# Altium PCB nrf52840_ckaa_var6.PcbDoc
Units mm, origin at the board's own origin, x right, y up, seen from the top; angles counter-clockwise.
Board outline 12.7 x 12.5 mm, 4 copper layers (Top Layer, Mid Layer 1, Mid Layer 2, Bottom Layer), stack 1.583 mm thick; 18 components, 60 nets, 169 pads, 104 vias.
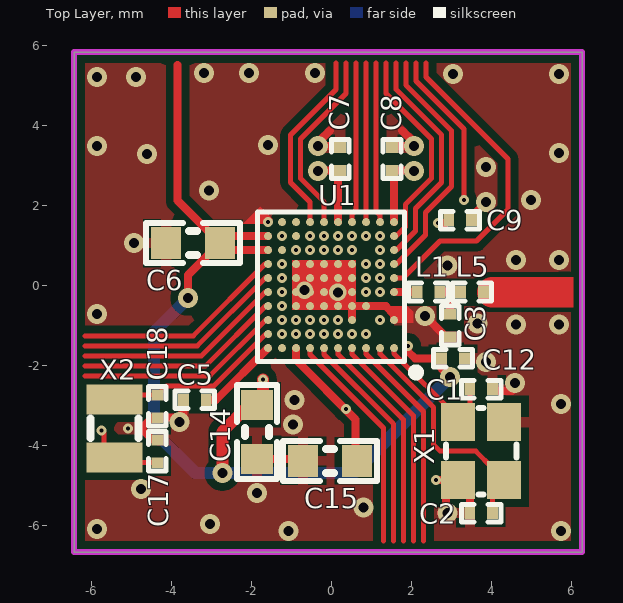
[diagram p0: Top Layer view]
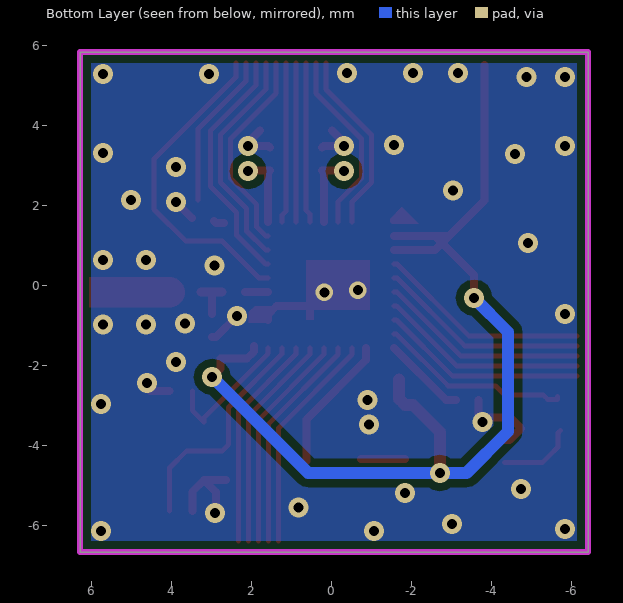
[diagram p1: Bottom Layer view, seen from below]
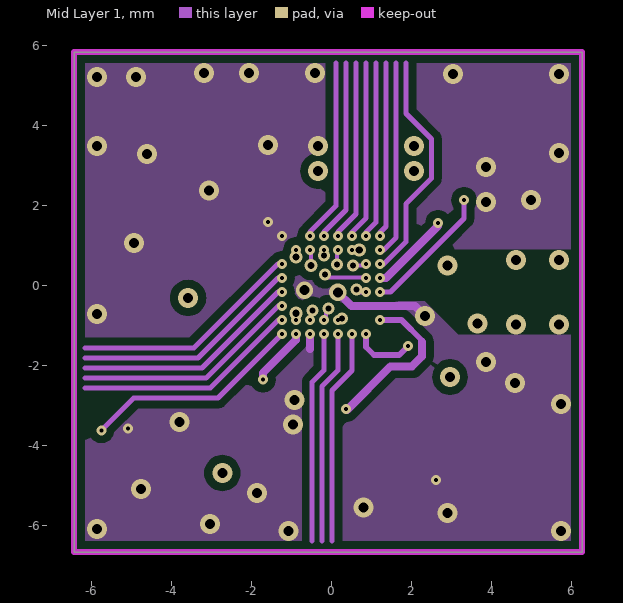
[diagram p2: Mid Layer 1]
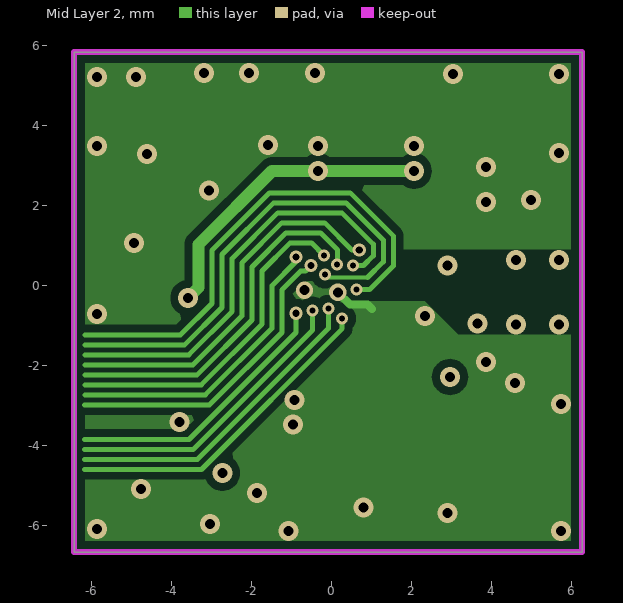
[diagram p3: Mid Layer 2]
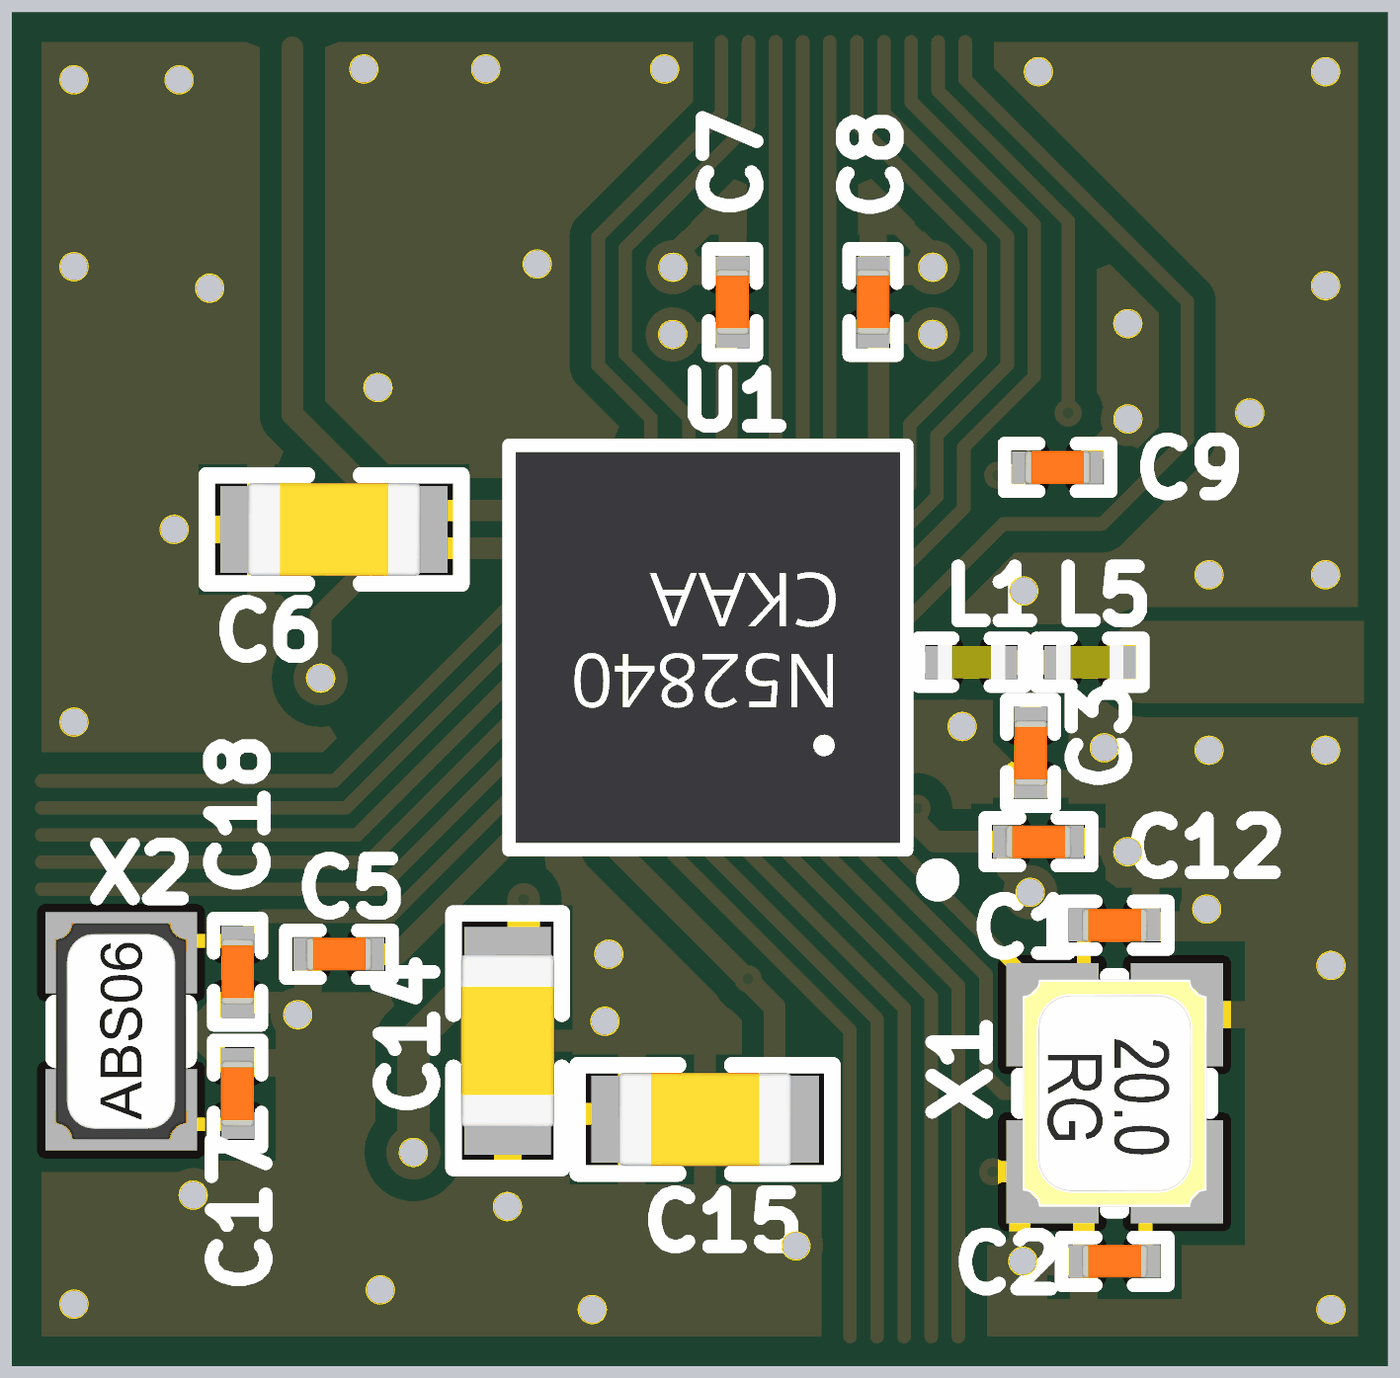
[diagram p4: 3D render of the assembled board from above, using the file's embedded part models]

## Layer stack, top to bottom
Top Solder: solder mask 0.0102, Solder Resist, Dk 3.5
Top Layer: signal copper 0.0356
Dielectric1: core 0.07, FR-4, Dk 4.8
Mid Layer 1: signal copper 0.036
Dielectric 3: prepreg 1.3, Dk 4.2
Mid Layer 2: signal copper 0.036
Dielectric 2: core 0.07, Dk 4.2
Bottom Layer: signal copper 0.0356
Bottom Solder: solder mask 0.0102, Solder Resist, Dk 3.5

## Board outline
-6.425,-6.675 6.275,-6.675 6.275,5.825 -6.425,5.825

## Design rules (kind name [scope] priority, off if disabled: settings)
Clearance Polygon_ANT [(InNamedPolygon('Top_Layer-GND')) or  (InNamedPolygon('Mid_Layer_1-GND')) or (InNamedPolygon('Mid_Layer_2-GND')) or (InNamedPolygon('Bottom_Layer-GND')) vs InNet('RF')] p1: gap=0.125 ignorepadtopadclearanceinfootprint=FALSE
Clearance Polygon [(InNamedPolygon('Top_Layer-GND')) or  (InNamedPolygon('Mid_Layer_1-GND')) or (InNamedPolygon('Mid_Layer_2-GND')) or (InNamedPolygon('Bottom_Layer-GND'))] p2: gap=0.2 ignorepadtopadclearanceinfootprint=FALSE
Clearance Clearance_Multi [OnLayer('Multi-Layer') vs OnLayer('Multi-Layer')] p3: gap=0.1 ignorepadtopadclearanceinfootprint=FALSE
Clearance Clearance_Top [OnLayer('Top Layer')] p4: gap=0.125 ignorepadtopadclearanceinfootprint=FALSE
Clearance [All] p5: gap=0.1 ignorepadtopadclearanceinfootprint=FALSE
ComponentClearance [All] p1 off: gap=0.254 collisioncheckmode=3 verticalgap=0.254 showdistances=FALSE
FabricationTestPointUsage TestPointUsage [All] p1: valid=0 allowmultiple=FALSE
FabricationTestpoint Testpoint [All] p1: side=3 testpointundercomponent=TRUE minsize=1.016 maxsize=2.54 preferedsize=1.524 minholesize=0 maxholesize=1.016 preferedholesize=0.813 testpointgrid=0.025 allowsidetop=TRUE allowsidebottom=TRUE usegrid=TRUE gridtolerance=0
Height [All] p1 off: minheight=0 maxheight=25.4 prefheight=12.7
HoleSize [All] p1: absolutevalues=TRUE maxlimit=4.064 minlimit=0.1 maxpercent=80.000 minpercent=20.000
MinimumAnnularRing [All] p1 off: minimumring=0.152
PlaneConnect [All] p1: planeconnectstyle=Relief reliefexpansion=0.508 reliefentries=4 reliefconductorwidth=0.254 reliefairgap=0.15
PolygonConnect PolygonConnect_1 [isVia and innet(gnd)] p1: connectstyle=Direct reliefconductorwidth=0.254 reliefentries=4 polygonreliefangle="90 Angle" airgapwidth=0.254
PolygonConnect [All] p2: connectstyle=Relief reliefconductorwidth=0.254 reliefentries=4 polygonreliefangle="90 Angle" airgapwidth=0.2
RoutingVias [All] p1: holewidth=0.2 width=0.35 viastyle="Through Hole" minholewidth=0.1 minwidth=0.25 maxholewidth=0.25 maxwidth=0.5
SilkToSolderMaskClearance SilkscreenOverComponentPads [IsPad] p1: minsilkscreentomaskgap=0.254 clearancetoexposedcopper=TRUE
SolderMaskExpansion [All] p1: expansion=0.076
Width [All] p1: maxlimit=2 minlimit=0.095 preferedwidth=0.15 midlayer1_minwidth=0.1 midlayer2_minwidth=0.1 bottomlayer_minwidth=0.1 minimp=50.000000 maximp=50.000000 favimp=50.000000
23 further rules are at their usual default settings.

## Components (designator, comment, footprint, x,y, rotation, side; value= is the part's Value field where it differs from the comment)
C1 "12pF" CAPC0603X03L_C 3.754,-2.603 r0 top
C2 "12pF" CAPC0603X03L_C 3.754,-5.705 r180 top
C3 "1.0pF" CAPC0603X03L_C 2.979,-1.013 r90 top
C5 "100nF" CAPC0603X03L_C -3.405,-2.87 r180 top
C6 "4.7µF" CAPC1608X06L -3.45,1.05 r180 top
C7 "100nF" CAPC0603X03L_C 0.228,3.15 r90 top
C8 "100nF" CAPC0603X03L_C 1.525,3.15 r90 top
C9 "820pF" CAPC0603X03L_C 3.227,1.622 r0 top
C12 "100nF" CAPC0603X03L_C 3.05,-1.832 r0 top
C14 "1.0µF" CAPC1608X06L -1.847,-3.67 r270 top
C15 "1.0µF" CAPC1608X06L -0.025,-4.394 r0 top
C17 "12pF" CAPC0603X03L_C -4.34,-4.157 r90 top
C18 "12pF" CAPC0603X03L_C -4.34,-3.032 r270 top
L1 "3.9nH" INDC0603X03L_C 2.432,-0.175 r0 top
L5 "4.7nH" INDC0603X03L_C 3.525,-0.175 r0 top
U1 "nRF52840_CKAA" BGA94C35P10X10_352X356X50 0,0 r180 top locked
X1 "32MHz" BT-XTAL_2016 3.754,-4.154 r270 top
X2 "32.768kHz" XTAL_2012 -5.415,-3.582 r90 top

## Footprints (in the part's own frame and the unit in brackets; to place one, negate y for a bottom-side part, rotate by r counter-clockwise, add the part's x,y. Pads: shape width x height; smd on the part's side, far side on the other; paste and mask are expansions set on the pad)
BGA94C35P10X10_352X356X50 [mm] "BGA, 94-Leads, Body 3.52x3.56mmx0.50mm, Pitch 0.35mm"
  round 0.2 smd mask+0.04: A1(-1.575,1.575) A2(-1.225,1.575) A3(-0.875,1.575) A4(-0.525,1.575) A5(-0.175,1.575) A6(0.175,1.575) A7(0.525,1.575) A8(0.875,1.575) A9(1.225,1.575) A10(1.575,1.575) B3(-0.875,1.225) B4(-0.525,1.225) B5(-0.175,1.225) B6(0.175,1.225) B7(0.525,1.225) B8(0.875,1.225) B9(1.225,1.225) B10(1.575,1.225) C1(-1.575,0.875) C2(-1.225,0.875) C4(-0.525,0.875) C5(-0.175,0.875) C6(0.175,0.875) C7(0.525,0.875) C8(0.875,0.875) C9(1.225,0.875) C10(1.575,0.875) D3(-0.875,0.525) D4(-0.525,0.525) D5(-0.175,0.525) D6(0.175,0.525) D7(0.525,0.525) D8(0.875,0.525) D9(1.225,0.525) D10(1.575,0.525) E1(-1.575,0.175) E2(-1.225,0.175) E3(-0.875,0.175) E4(-0.525,0.175) E5(-0.175,0.175) E6(0.175,0.175) E7(0.525,0.175) E8(0.875,0.175) E9(1.225,0.175) E10(1.575,0.175) F1(-1.575,-0.175) F2(-1.225,-0.175) F3(-0.875,-0.175) F4(-0.525,-0.175) F5(-0.175,-0.175) F6(0.175,-0.175) F7(0.525,-0.175) F8(0.875,-0.175) F9(1.225,-0.175) F10(1.575,-0.175) G1(-1.575,-0.525) G2(-1.225,-0.525) G3(-0.875,-0.525) G4(-0.525,-0.525) G5(-0.175,-0.525) G6(0.175,-0.525) G7(0.525,-0.525) G8(0.875,-0.525) G9(1.225,-0.525) G10(1.575,-0.525) H1(-1.575,-0.875) H2(-1.225,-0.875) H4(-0.525,-0.875) H5(-0.175,-0.875) H6(0.175,-0.875) H7(0.525,-0.875) H8(0.875,-0.875) H9(1.225,-0.875) H10(1.575,-0.875) J1(-1.575,-1.225) J2(-1.225,-1.225) J3(-0.875,-1.225) J4(-0.525,-1.225) J5(-0.175,-1.225) J6(0.175,-1.225) J7(0.525,-1.225) J8(0.875,-1.225) J9(1.225,-1.225) J10(1.575,-1.225) K1(-1.575,-1.575) K2(-1.225,-1.575) K3(-0.875,-1.575) K4(-0.525,-1.575) K5(-0.175,-1.575) K6(0.175,-1.575) K7(0.525,-1.575) K8(0.875,-1.575) K9(1.225,-1.575) K10(1.575,-1.575)
  silkscreen extent -2.22,-1.83 1.83,2.28, body extent -1.77,-1.76 1.77,1.84, height 0.47
BT-XTAL_2016 [mm] "Crystal 2.0 x 1.6 mm"
  rect 0.95x0.85 smd: 1(-0.725,-0.575) 2(0.725,-0.575) 3(0.725,0.575) 4(-0.725,0.575)
  silkscreen extent -1.08,-0.88 1.08,0.88, body extent -1.05,-0.85 1.05,0.85, height 0.56
CAPC0603X03L_C [mm] "Chip Capacitor, 2-Leads, Body 0.6x0.3mm, IPC High Density"
  rect 0.27x0.3 smd: 1(-0.285,0) 2(0.285,0)
  silkscreen extent -0.49,-0.22 0.49,0.22, body extent -0.3,-0.15 0.31,0.15, height 0.3
CAPC1608X06L [mm] "Chip Capacitor, 2-Leads, Body 1.6x0.8mm, IPC High Density"
  rect 0.75x0.8 smd: 1(-0.675,0) 2(0.675,0)
  silkscreen extent -1.17,-0.5 1.17,0.5, body extent -0.8,-0.43 0.8,0.43, height 0.8
INDC0603X03L_C [mm] "Chip Inductor, 2-Leads, Body 0.6x0.3mm, IPC High Density"
  rect 0.27x0.3 smd: 1(-0.285,0) 2(0.285,0)
  silkscreen extent -0.49,-0.22 0.49,0.22, body extent -0.31,-0.16 0.31,0.16, height 0.26
XTAL_2012 [mm] "XTAL SMD 2.0 x 1.2 mm"
  rect 0.75x1.4 smd: 1(-0.725,0) 2(0.725,0)
  silkscreen extent -0.24,-0.6 0.24,0.6, body extent -1,-0.61 1,0.61, height 0.6

## Part data
C1 C2 C17 C18: library part C0201-12p, "Capacitor, NP0, ±2%", Footprint Doc=0201, LatestRevisionDate=2017-11-09, Part Number=C0201-12p, Pin Count=2, Published=2014-11-13, Publisher="Nordic Semiconductor"
C3: library part C0201-1.0p, "Capacitor, NP0, ±5%", Footprint Doc=0201, LatestRevisionDate=2018-10-22, Part Number=C0201-1.0p, Pin Count=2, Published=2014-11-13, Publisher="Nordic Semiconductor"
C5 C7 C8 C12: library part C0201-100n, "Capacitor, X7R, ±10%", Footprint Doc=0201, LatestRevisionDate=2017-11-09, Part Number=C0201-100n, Pin Count=2, Published=2014-11-13, Publisher="Nordic Semiconductor"
C6: library part C0603-4µ7-6.3V-X7R, "Capacitor, X7R, ±10%", Footprint Doc=0603, LatestRevisionDate=2015-06-10, Part Number=C0603-4µ7-6.3V-X7R, Pin Count=2, Published=2015-06-10, Publisher="Nordic Semiconductor"
C9: library part C0201-820p, "Capacitor, X7R, ±10%", Footprint Doc=0201, LatestRevisionDate=2017-11-09, Part Number=C0201-820p, Pin Count=2, Published=2014-11-13, Publisher="Nordic Semiconductor"
C14 C15: library part C0603-1µ0, "Capacitor, X7R, ±10%", Footprint Doc=0603, LatestRevisionDate=2013-06-05, Part Number=C0603-1µ0, Pin Count=2, Published=2009-05-08, Publisher="Nordic Semiconductor"
L1: library part L0201-3n9, "High frequency chip inductor ±5%", Footprint Doc=0201, LatestRevisionDate=2017-11-09, Part Number=L0201-3n9, Pin Count=2, Published=2013-04-10, Publisher="Nordic Semiconductor"
L5: library part L0201-4n7, "High frequency chip inductor ±5%", Footprint Doc=0201, LatestRevisionDate=2013-04-10, Part Number=L0201-4n7, Pin Count=2, Published=2013-04-10, Publisher="Nordic Semiconductor"
U1: library part nRF52840-CKAAD0, "Multi-protocol Bluetooth Low Energy, IEEE 802.15.4, ANT and 2.4GHz proprietary system-on-chip", Manufacturer="Nordic Semiconductor", Footprint Doc=WLCSP-94, LatestRevisionDate=2018-12-17, Manufacturer Part Number=nRF52840-CKAAD0, Part Number=nRF52840-CKAAD0, Pin Count=94, Published=2018-12-17, Publisher="Nordic Semiconductor"
X1: library part XTAL_SMD2016_32MHz_8pF_General, "XTAL SMD 2016, 32MHz, Cl=8pF, Total Tol: ±40ppm", Footprint Doc=XTAL_2016, LatestRevisionDate=2016-08-19, Part Number=XTAL_SMD2016_32MHz_8pF_General, Pin Count=4, Published=2016-08-19, Publisher="Nordic Semiconductor"
X2: library part XTAL_SMD2012_32.768kHz_9pF_General, "XTAL SMD 2012, 32.768kHz, Cl=9pF, Total Tol: ±50ppm", Footprint Doc=XTAL_2012, LatestRevisionDate=2017-01-11, Part Number=XTAL_SMD2012_32.768kHz_9pF_General, Pin Count=2, Published=2016-08-19, Publisher="Nordic Semiconductor"

## Free pads (board coordinates)
  round 0.25 on Mech16: 1(-1.575,1.575) 1(-1.225,-1.225) 1(-1.225,-0.875) 1(-1.225,-0.525) 1(-1.225,0.175) 1(-1.225,0.525) 1(-1.225,1.225) 1(-1.225,-0.175) 1(-0.875,-1.225) 1(-0.875,-0.875) 1(-0.875,0.875) 1(-0.525,-1.225) 1(-0.525,-0.875) 1(-0.525,0.875) 1(-0.525,1.225) 1(-0.175,-1.225) 1(-0.175,-0.875) 1(-0.175,0.875) 1(-0.175,1.225) 1(0.175,-1.225) 1(0.175,-0.875) 1(0.175,0.875) 1(0.175,1.225) 1(0.525,-1.225) 1(0.525,0.875) 1(0.525,1.225) 1(0.875,-1.225) 1(0.875,-0.175) 1(0.875,0.175) 1(0.875,0.525) 1(0.875,1.225) 1(1.225,-0.879) 1(1.225,-0.175) 1(1.225,0.175) 1(1.225,0.525) 1(1.225,0.875) 1(1.225,1.225)
  round 0.43 on Mech16: 1(-0.667,-0.128) 1(0.169,-0.182)

## Via types
v1: diameter 0.5, hole 0.25, Top Layer to Bottom Layer, tented both sides, 45 vias
v2: diameter 0.25, hole 0.1, Top Layer to Mid Layer 1, tented both sides, 45 vias
v3: diameter 0.3, hole 0.15, Mid Layer 1 to Mid Layer 2, tented both sides, 8 vias
v4: diameter 0.33, hole 0.18, Mid Layer 1 to Mid Layer 2, tented both sides, 4 vias
v5: diameter 0.43, hole 0.25, Top Layer to Bottom Layer, tented both sides, 2 vias

## Nets (pads, with @x,y where several pads share a name; then routed paths per layer and width w, separated by ;. In a path a pad name is that pad's centre, name@x,y a point inside that pad or via, vN(x,y) a via of type N, cw(c..) or ccw(c..) an arc to the next point about the centre after c; other vN are vias at no path point)
DEC1: C5.1 U1.A10 | length 2.1
  Top Layer w0.2: C5.1 -2.87,-2.87 U1.A10
DEC4_6: C15.2 U1.A8 U1.C2 | length 7.8
  Top Layer w0.2: U1.A8@-0.878,-1.575 -0.878,-1.866 -0.875,-1.868 ; U1.A8 -0.875,-1.868 ; C15.2@0.615,-4.394 0.615,-3.358 -0.875,-1.868
  Mid Layer 1 w0.15: v2(1.225,-0.879) 1.768,-0.879 2.275,-1.386 2.275,-1.425
  Mid Layer 1 w0.2: v2@0.397,-3.125 1.489,-2.032 2.025,-2.032 2.275,-1.782 2.275,-1.425
  other v2: 0.371,-3.099
GND: C1.2 C2.2 C3.1 C5.2 C6.2 C7.2 C8.2 C9.2 C12.2 C14.2 C15.1 C17.2 C18.2 U1.B7 U1.C1 U1.C4 U1.D3 U1.D4 U1.D5 U1.D6 U1.D7 U1.D8 U1.E4 U1.E5 U1.E6 U1.E7 U1.E8 U1.F4 U1.F5 U1.F6 U1.F7 U1.F8 U1.G4 U1.G5 U1.G6 U1.G7 U1.G8 U1.J9 U1.K10 X1.2 X1.4 | length 14.6
  Top Layer w0.2: C17.2 -4.457,-3.872 -4.746,-3.583 -4.746,-3.581 -4.482,-3.317 C18.2 -3.707,-3.317 -3.69,-3.334 C5.2 ; C14.2 C15.1@-0.75,-4.345 ; -0.025,3.861 -0.322,3.564 v1(-0.322,3.47) 0.192,3.47 C7.2 ; U1.D4 1.312,-0.525 1.316,-0.529 1.37,-0.529 1.575,-0.734 U1.C1 ; C8.2 1.56,3.47 v1(2.075,3.47) ; 1.778,3.861 v1@2.075,3.564 ; v1(2.347,-0.769) 2.876,-1.298 C3.1 ; v2(2.629,-4.879) X1.2 ; v1@2.754,-5.704 2.879,-5.579 2.879,-5.179 X1.2 ; C2.2@3.469,-5.654 3.469,-5.169 X1.2 ; C9.2@3.478,1.671 v1(3.876,2.07) ; C1.2@4.039,-2.654 v1@4.529,-2.654
  Mid Layer 1 w0.2: -0.525,-1.6 v2(-0.525,-1.225) ; v5(0.169,-0.182) 0.512,-0.525 2.1,-0.525 v1@2.25,-0.675
  Mid Layer 2 w0.2: v5(0.169,-0.182) 0.475,-0.488 0.913,-0.488 1.025,-0.6
  other v1: -1.067,-6.15 5.75,-6.15 -5.85,-6.1 -3.023,-5.969 2.906,-5.704 0.813,-5.563 -1.85,-5.2 -4.75,-5.095 -0.95,-3.49 -3.785,-3.429 5.75,-2.975 -0.914,-2.87 4.604,-2.454 3.875,-1.925 4.625,-0.988 5.7,-0.988 3.658,-0.965 -5.85,-0.728 2.915,0.482 4.625,0.632 5.7,0.632 -4.925,1.05 5,2.125 -3.045,2.36 3.875,2.95 -4.597,3.277 5.7,3.3 -5.85,3.475 -1.575,3.5 -5.85,5.2 -4.879,5.2 3.05,5.275 5.7,5.275 -3.175,5.3 -2.05,5.3 -0.4,5.3
  other v2: -5.08,-3.581 -1.225,1.225 -1.575,1.575
  other v5: -0.667,-0.128
NetC3_2: C3.2 L1.2 L5.1 | length 1.1
  Top Layer w0.203: C3.2 2.979,-0.188 2.991,-0.175
  Top Layer w0.229: L1.2@2.724,-0.175 2.991,-0.175 L5.1 L5.1@3.252,-0.175
NetC9_1: C9.1 U1.F2 | length 2.3
  Top Layer w0.2: v2(2.675,1.55) 2.875,1.55 C9.1@2.923,1.598
  Mid Layer 1 w0.2: v2(1.225,0.175) 1.377,0.175 2.675,1.473 v2(2.675,1.55)
NetL1_1: L1.1 U1.E1 | length 0.6
  Top Layer w0.2: U1.E1 L1.1
P0.00/XL1: C17.1 U1.B9 X2.1 | length 7.4
  Top Layer w0.125: v2(-5.74,-3.632) -5.675,-3.697 -5.675,-4.047 X2.1@-5.44,-4.282 ; X2.1 -5.28,-4.442 C17.1
  Mid Layer 1 w0.125: v2(-5.74,-3.632) -4.933,-2.825 -2.825,-2.825 v2(-1.225,-1.225)
P0.01/XL2: C18.1 U1.B10 X2.2 | length 4.8
  Top Layer w0.125: X2.2@-5.665,-2.789 -5.665,-2.857 X2.2 -5.305,-2.747 C18.1 -4.113,-2.52 -2.927,-2.52 -1.632,-1.225 U1.B10
P0.02/AIN0: U1.B6 | length 5.3
  Mid Layer 1 w0.125: -0.475,-6.4 -0.475,-2.43 -0.175,-2.131 v2(-0.175,-1.225)
P0.03/AIN1: U1.A5 | length 5.5
  Top Layer w0.125: U1.A5 0.175,-1.732 1.811,-3.368 1.811,-6.4
P0.04/AIN2: U1.C10 | length 5.1
  Top Layer w0.125: -6.147,-2.27 -3.03,-2.27 -1.635,-0.875 U1.C10
P0.05/AIN3: U1.D10 | length 5.2
  Top Layer w0.125: -6.147,-2.02 -3.134,-2.02 -1.639,-0.525 U1.D10
P0.06: U1.E9 | length 5.7
  Mid Layer 1 w0.125: -6.15,-2.075 -3.224,-2.075 -1.324,-0.175 v2(-1.225,-0.175)
P0.07: U1.F9 | length 5.8
  Mid Layer 1 w0.125: -6.15,-1.825 -3.328,-1.825 -1.328,0.175 v2(-1.225,0.175)
P0.08: U1.E10 | length 5.2
  Top Layer w0.125: -6.147,-1.77 -3.237,-1.77 -1.642,-0.175 U1.E10
P0.09/NFC1: U1.F1 | length 8.1
  Top Layer w0.125: U1.F1 1.801,0.175 2.726,1.1 3.637,1.1 4.425,1.888 4.425,3.153 2.375,5.203 2.375,5.55
P0.10/NFC2: U1.E2 | length 7.2
  Top Layer w0.125: 2.125,5.55 2.125,5.099 3.325,3.899 v2(3.325,2.125)
  Mid Layer 1 w0.125: v2(1.225,-0.175) 1.487,-0.175 3.325,1.663 v2(3.325,2.125)
P0.11: U1.H8 | length 7.6
  Mid Layer 1 w0.125: v4(-0.875,0.703) v2(-0.875,0.875)
  Mid Layer 2 w0.125: -6.15,-2.745 -3.141,-2.745 -1.478,-1.081 -1.478,-0.016 -0.875,0.587 v4(-0.875,0.703)
P0.12: U1.G10 | length 5.3
  Top Layer w0.125: -6.147,-1.27 -3.444,-1.27 -1.649,0.525 U1.G10
P0.13: U1.H7 | length 8.1
  Mid Layer 1 w0.1: v2(-0.525,0.875) -0.503,0.853 v4(-0.503,0.485)
  Mid Layer 2 w0.125: -6.161,-2.995 -3.037,-2.995 -1.228,-1.185 -1.228,-0.119 -0.758,0.351 -0.637,0.351 v4(-0.503,0.485)
P0.14: U1.J7 | length 4.6
  Mid Layer 1 w0.125: v2(-0.525,1.225) -0.525,1.331 0.125,1.981 0.125,5.55
P0.15: U1.K7 | length 4.6
  Top Layer w0.125: U1.K7 -0.525,2.078 -1.013,2.565 -1.013,3.752 0.125,4.89 0.125,5.55
P0.16: U1.H6 | length 8.5
  Mid Layer 1 w0.125: v3(-0.175,0.74) v2(-0.175,0.875)
  Mid Layer 2 w0.125: -6.15,-2.495 -3.244,-2.495 -1.728,-0.978 -1.728,0.349 -1.021,1.056 -0.49,1.056 v3(-0.175,0.74)
P0.17: U1.J6 | length 4.6
  Mid Layer 1 w0.125: v2(-0.175,1.225) -0.175,1.328 0.375,1.878 0.375,5.55
P0.18/RESET: U1.K6 | length 4.7
  Top Layer w0.125: U1.K6 -0.175,2.081 -0.763,2.669 -0.763,3.649 0.375,4.786 0.375,5.55
P0.19: U1.K4 | length 4
  Top Layer w0.125: U1.K4 0.525,1.77 0.625,1.87 0.625,5.55
P0.20: U1.J5 | length 4.5
  Mid Layer 1 w0.125: v2(0.175,1.225) 0.175,1.324 0.625,1.774 0.625,5.55
P0.21: U1.J4 | length 4.5
  Mid Layer 1 w0.125: v2(0.525,1.225) 0.525,1.32 0.875,1.67 0.875,5.55
P0.22: U1.K3 | length 4
  Top Layer w0.125: U1.K3 0.875,5.55
P0.23: U1.H5 | length 9.5
  Mid Layer 1 w0.1: v3(0.155,0.514) 0.155,0.855 v2(0.175,0.875)
  Mid Layer 2 w0.125: -6.15,-2.245 -3.348,-2.245 -1.978,-0.874 -1.978,0.453 -1.125,1.306 -0.263,1.306 0.163,0.88 0.163,0.522 v3(0.155,0.514)
P0.24: U1.H4 | length 9.6
  Mid Layer 1 w0.125: v2(0.525,0.875) v4(0.703,0.875)
  Mid Layer 2 w0.125: -6.15,-1.995 -3.451,-1.995 -2.228,-0.771 -2.228,0.556 -1.228,1.556 -0.16,1.556 0.521,0.875 v4(0.703,0.875)
P0.25: U1.K2 | length 4
  Top Layer w0.125: 1.125,5.55 1.125,1.847 1.225,1.747 U1.K2
P0.26: U1.C9 | length 5.6
  Mid Layer 1 w0.125: -6.15,-2.575 -3.017,-2.575 -1.317,-0.875 v2(-1.225,-0.875)
P0.27: U1.D9 | length 5.7
  Mid Layer 1 w0.125: -6.15,-2.325 -3.12,-2.325 -1.32,-0.525 v2(-1.225,-0.525)
P0.28/AIN4: U1.A6 | length 5.5
  Top Layer w0.125: U1.A6 -0.175,-1.735 1.561,-3.471 1.561,-6.4
P0.29/AIN5: U1.C7 | length 7.4
  Mid Layer 2 w0.125: -6.161,-4.111 -3.446,-4.111 -0.465,-1.129 v3(-0.465,-0.637)
  other v2: -0.525,-0.875
P0.30/AIN6: U1.A7 | length 5.6
  Top Layer w0.125: U1.A7 -0.525,-1.739 1.311,-3.575 1.311,-6.4
P0.31/AIN7: U1.C8 | length 7
  Mid Layer 1 w0.125: v2(-0.875,-0.875) v4(-0.875,-0.703)
  Mid Layer 2 w0.125: -6.161,-3.861 -3.55,-3.861 -0.875,-1.186 v4(-0.875,-0.703)
P1.00: U1.J3 | length 4.4
  Mid Layer 1 w0.125: v2(0.875,1.225) 0.875,1.317 1.125,1.567 1.125,5.55
P1.01: U1.J1 | length 5.2
  Top Layer w0.125: 1.375,5.55 1.375,4.789 2.513,3.651 2.513,2.669 1.863,2.019 1.863,1.456 1.632,1.225 U1.J1
P1.02: U1.G3 | length 11
  Mid Layer 1 w0.1: v3(0.555,0.487) 0.837,0.487 v2(0.875,0.525)
  Mid Layer 2 w0.125: -6.15,-1.745 -3.555,-1.745 -2.478,-0.667 -2.478,0.66 -1.332,1.806 0.271,1.806 1.055,1.021 1.055,0.729 0.813,0.487 v3(0.555,0.487)
P1.03: U1.F3 | length 13.4
  Mid Layer 1 w0.1: v3(-0.154,0.26) -0.081,0.187 0.863,0.187 v2(0.875,0.175) v2@0.836,0.175
  Mid Layer 2 w0.1: v3(-0.154,0.26) -0.081,0.187 0.912,0.187
  Mid Layer 2 w0.125: -6.15,-1.495 -3.659,-1.495 -2.728,-0.564 -2.728,0.763 -1.435,2.056 0.375,2.056 1.305,1.125 1.305,0.58 0.912,0.187
P1.04: U1.H1 | length 5.7
  Top Layer w0.125: U1.H1 1.635,0.875 2.113,1.352 2.113,1.915 2.763,2.565 2.763,3.755 1.625,4.892 1.625,5.55
P1.05: U1.G2 | length 5.9
  Mid Layer 1 w0.125: v2(1.225,0.525) 1.321,0.525 1.875,1.079 1.875,2.031 2.513,2.669 2.513,3.651 1.875,4.289 1.875,5.55
P1.06: U1.E3 | length 12.6
  Mid Layer 1 w0.125: v3(0.634,-0.113) 0.696,-0.175 v2(0.875,-0.175)
  Mid Layer 2 w0.125: -6.15,-1.245 -3.762,-1.245 -2.978,-0.46 -2.978,0.867 -1.539,2.306 0.478,2.306 1.556,1.228 1.556,0.477 0.966,-0.113 v3(0.634,-0.113)
P1.07: U1.G1 | length 6.1
  Top Layer w0.125: U1.G1 1.639,0.525 2.363,1.249 2.363,1.812 3.013,2.462 3.013,3.858 1.875,4.996 1.875,5.55
P1.08: U1.G9 | length 5.8
  Mid Layer 1 w0.125: -6.15,-1.575 -3.431,-1.575 -1.331,0.525 v2(-1.225,0.525)
P1.09: U1.F10 | length 5.3
  Top Layer w0.125: -6.147,-1.52 -3.341,-1.52 -1.646,0.175 U1.F10
P1.10: U1.B4 | length 5.4
  Mid Layer 1 w0.125: 0.025,-6.4 0.025,-2.638 0.525,-2.138 v2(0.525,-1.225)
P1.11: U1.A3 | length 5.4
  Top Layer w0.125: U1.A3 0.875,-1.724 2.311,-3.161 2.311,-6.4
P1.12: U1.C5 | length 8.3
  Mid Layer 1 w0.1: v2(0.175,-0.875) v3@0.175,-0.836
  Mid Layer 1 w0.125: v2(0.175,-0.875) 0.217,-0.875 v3@0.254,-0.838
  Mid Layer 2 w0.125: -6.161,-4.611 -3.239,-4.611 0.279,-1.092 v3(0.279,-0.838)
P1.13: U1.A4 | length 5.5
  Top Layer w0.125: U1.A4 0.525,-1.728 2.061,-3.264 2.061,-6.4
P1.14: U1.B5 | length 5.3
  Mid Layer 1 w0.125: -0.225,-6.4 -0.225,-2.534 0.175,-2.134 v2(0.175,-1.225)
P1.15: U1.C6 | length 8.3
  Mid Layer 1 w0.1: v2(-0.175,-0.875) -0.125,-0.825 -0.125,-0.646 v3(-0.067,-0.588)
  Mid Layer 2 w0.125: -6.161,-4.361 -3.343,-4.361 -0.067,-1.085 v3(-0.067,-0.588)
RF: L5.2 | length 1.6
  Top Layer w0.762: 4.033,-0.175 5.675,-0.175
SWDCLK: U1.H2 | length 4.9
  Mid Layer 1 w0.125: v2(1.225,0.875) 1.317,0.875 1.625,1.183 1.625,5.55
SWDIO: U1.J2 | length 4.4
  Mid Layer 1 w0.125: v2(1.225,1.225) 1.225,1.313 1.375,1.463 1.375,5.55
VDD_NRF: C6.1 C7.1 C8.1 C12.1 C14.1 U1.B3 U1.B8 U1.H10 U1.J10 U1.K1 U1.K5 | length 41.2
  Top Layer w0.2: -3.835,5.5 -3.835,2.112 C6.1@-2.949,1.225 ; v1(-3.574,-0.322) -3.574,0.251 C6.1 ; C6.1@-3.035,1.31 -2.95,1.225 C6.1 ; U1.H10 -2.6,0.875 -2.774,1.049 C6.1 ; U1.J10 C6.1@-2.6,1.225 ; v1(-0.325,2.85) -0.31,2.865 0.225,2.865 0.175,2.814 U1.K5 ; U1.K1 1.575,2.814 C8.1 2.06,2.865 v1(2.075,2.85) ; v2(1.93,-1.524) 1.93,-1.666 2.096,-1.832 C12.1 2.765,-2.091 v1(2.974,-2.3) ; C6.1@-2.949,1.225 C6.1@-2.6,1.225 ; C6.1@-2.949,1.225 C6.1 C6.1@-2.6,1.225
  Top Layer w0.3: v1(-2.718,-4.7) -2.718,-3.671 -2.042,-2.995 C14.1 -1.7,-2.847 v2(-1.7,-2.364)
  Mid Layer 1 w0.15: v2(0.875,-1.225) 0.875,-1.55 1.075,-1.75 1.704,-1.75 v2(1.93,-1.524)
  Mid Layer 1 w0.2: v2(-1.7,-2.364) -1.7,-2.195 -0.875,-1.37 v2(-0.875,-1.225)
  Mid Layer 2 w0.3: v1(-3.574,-0.322) -3.317,-0.067 -3.317,1.007 -1.474,2.85 v1(-0.325,2.85) v1(2.075,2.85)
  Bottom Layer w0.3: v1(-3.574,-0.322) -4.42,-1.17 -4.42,-3.667 -3.387,-4.7 v1(-2.718,-4.7) 0.574,-4.7 v1(2.974,-2.3)
XC1: C1.1 U1.A1 X1.1 | length 3.4
  Top Layer w0.125: U1.A1 1.575,-1.717 3.179,-3.321 X1.1 3.469,-3.139 C1.1@3.469,-2.654
XC2: C2.1 U1.A2 X1.3 | length 5.8
  Top Layer w0.125: U1.A2 1.225,-1.721 2.566,-3.062 2.566,-3.991 2.729,-4.154 3.619,-4.154 4.039,-4.574 C2.1@4.039,-5.654
pads on no net: U1.A9 U1.H9 U1.J8 U1.K8 U1.K9

## Polygon pours and split planes (outlines as drawn)
GND on Mid Layer 2 "Mid_Layer_2-GND" (solid, remove dead copper, pour order 1002): -11.275,10.239 -11.275,-10.275 9.75,-10.275 9.75,10.239
GND on Bottom Layer "Bottom_Layer-GND" (solid, remove dead copper, pour order 1001): -11.075,10.45 -11.075,-10.15 10.008,-10.15 10.008,10.45
GND on Mid Layer 1 "Mid_Layer_1-GND" (solid, remove dead copper, pour order 1004): -11.7,9.389 -11.7,-11.125 9.325,-11.125 9.325,9.389
GND on Top Layer "Top_Layer-GND" (solid, remove dead copper, pour order 1000): -10.975,10.414 -10.975,-10.1 10.05,-10.1 10.05,10.414

## Keep-outs
Keep-Out Layer:
  the board outline again, w0.152

## Other copper
Top Layer:
  rectangle net RF: 5.256,-0.556 6.056,0.206
  rectangle net GND: -0.975,-0.625 0.625,0.625
  rectangle net GND: 0.425,-0.875 0.625,-0.425
  pour cut-out: -3.88,0.804 -3.88,1.253 -3.705,1.253 -3.705,0.804
  region net GND: -2.193,1.526 -1.522,1.526 -1.473,1.575 -1.473,1.659 -1.766,1.952
  region net GND: 1.906,-0.525 2.053,-0.672 2.053,-0.937 1.637,-0.937 1.499,-0.799 1.499,-0.525
Mid Layer 1:
  pour cut-out: 6.426,-1.245 3.175,-1.245 2.337,-0.406 1.676,-0.406 1.676,0.895 6.426,0.895
Mid Layer 2:
  pour cut-out: 6.426,-1.245 3.175,-1.245 2.337,-0.406 0.813,-0.406 0.813,0.895 6.426,0.895

## Silkscreen, mask and mechanical layers (free items; w line width, h text height)
Mechanical 1:
  the board outline again, w0.152

## Dimensions
6.275,-6.675 to 6.275,5.825 on Mechanical 3
6.275,-6.675 to -6.425,-6.675 on Mechanical 3